# Altium PCB IMTM-Left-PCB02.PcbDoc
Units mm, origin at the board's own origin, x right, y up, seen from the top; angles counter-clockwise.
Board outline 27 x 21 mm, 3 copper layers (Top Layer, GND Layer, Bottom Layer), stack 1.49 mm thick; 9 components, 17 nets, 44 pads, 13 vias.
Unrouted connection lines stored in the file: 6.
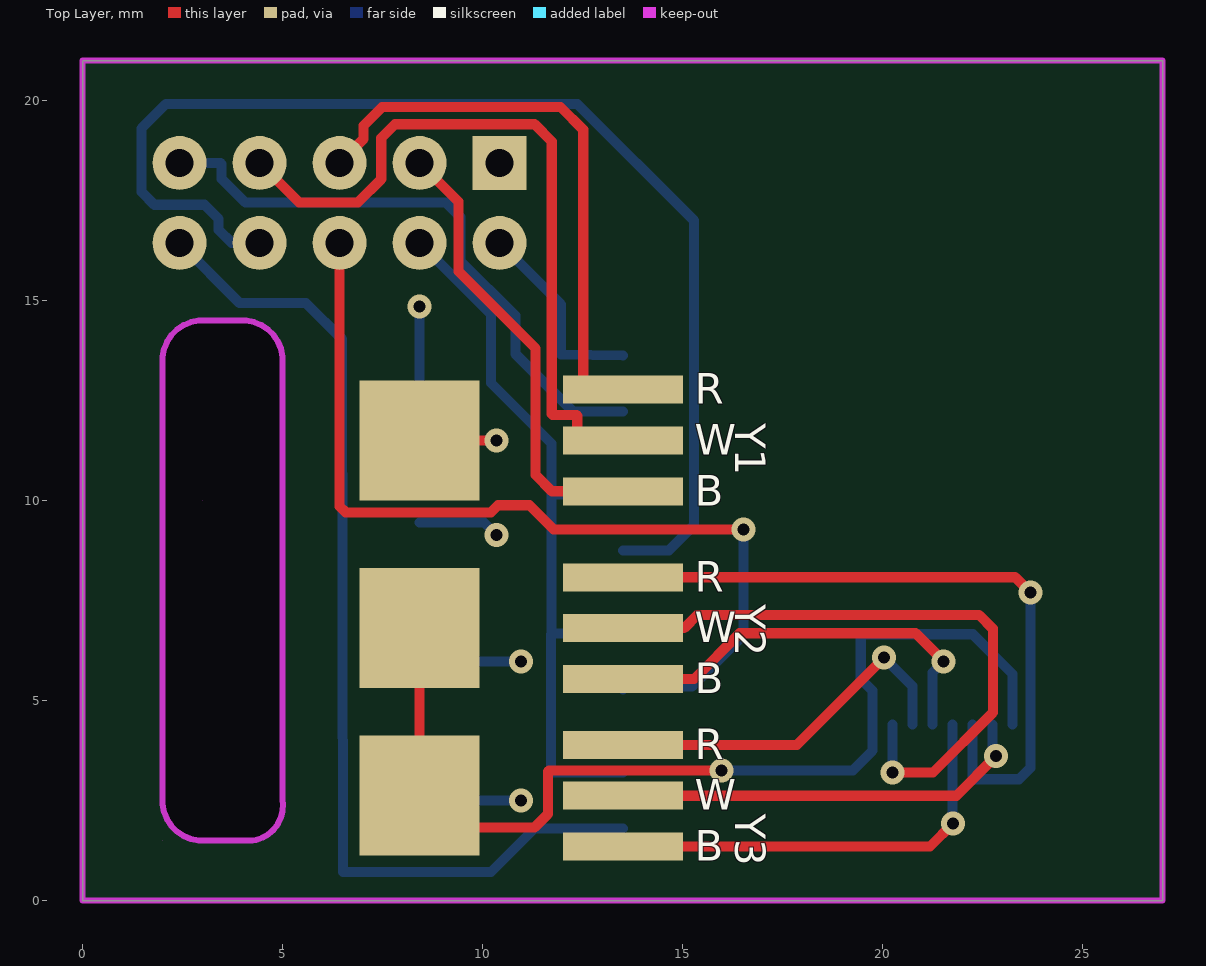
[diagram p0: Top Layer view]
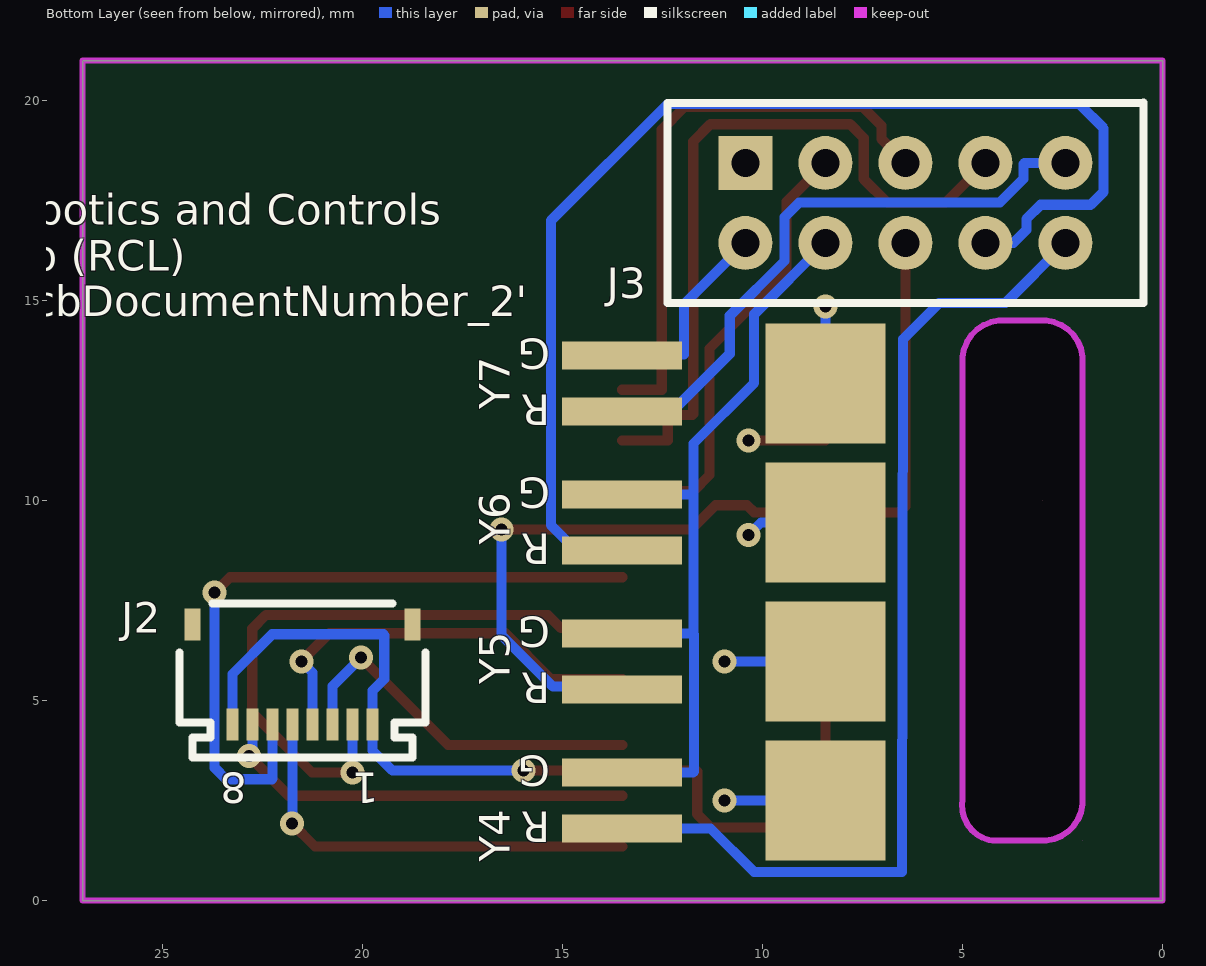
[diagram p1: Bottom Layer view, seen from below]
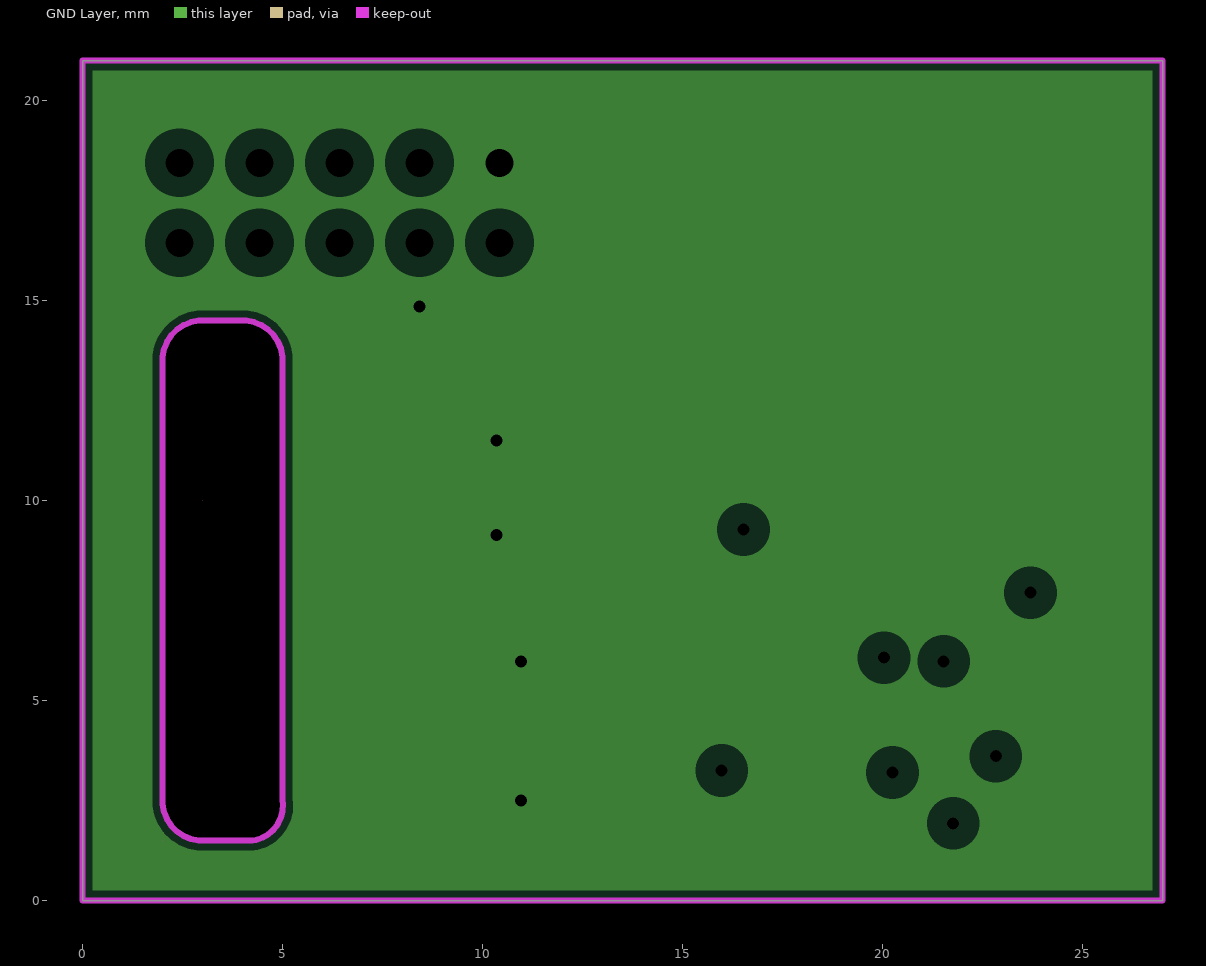
[diagram p2: GND Layer, clearances drawn from the general rule]

## Layer stack, top to bottom
Top Solder: solder mask 0.0254, SM-001, Dk 4
Top Layer: signal copper 0.035
Dielectric 1: prepreg 0.185, PP-7628, Dk 0
GND Layer: plane copper 0.035, net GND
Dielectric 2: core 1.2, Dk 0
Bottom Layer: signal copper 0.035
Bottom Solder: solder mask 0.0254, SM-001, Dk 4

## Board outline
0,0 27,0 27,21 24,21 0,21
cut-out: 2,2.5 2,13.5 cw(c3,13.5) 3,14.5 4,14.5 cw(c4,13.5) 5,13.5 5,2.5 cw(c4.125,2.375) 4.25,1.5 3,1.5 cw(c2.999,2.499)
cut-out: 2,2.5 2,13.5 cw(c3,13.5) 3,14.5 4,14.5 cw(c4,13.5) 5,13.5 5,2.5 cw(c4.125,2.375) 4.25,1.5 3,1.5 cw(c2.999,2.499)
cut-out: 3,10
cut-out: 3,10
cut-out: 2,13
cut-out: 2,1.5

## Design rules (kind name [scope] priority, off if disabled: settings)
Clearance [All] p1: gap=0.15 ignorepadtopadclearanceinfootprint=FALSE
ComponentClearance [All] p1: gap=0.1 collisioncheckmode=3 verticalgap=0.254 showdistances=FALSE
FabricationTestPointUsage TestPointUsage [All] p1: valid=0 allowmultiple=FALSE
FabricationTestpoint Testpoint [All] p1: side=3 testpointundercomponent=TRUE minsize=1.016 maxsize=2.54 preferedsize=1.524 minholesize=0 maxholesize=1.016 preferedholesize=0.813 testpointgrid=0.025 allowsidetop=TRUE allowsidebottom=TRUE usegrid=TRUE gridtolerance=0
PlaneClearance [All] p1: clearance=0.508
PlaneConnect [All] p1: planeconnectstyle=Relief reliefexpansion=0.254 reliefentries=4 reliefconductorwidth=0.254 reliefairgap=0.254
PolygonConnect [All] p1: connectstyle=Relief reliefconductorwidth=0.254 reliefentries=4 polygonreliefangle="90 Angle" airgapwidth=0.254
RoutingVias [All] p1: holewidth=0.3 width=0.6 viastyle="Through Hole" minholewidth=0.3 minwidth=0.6 maxholewidth=0.3 maxwidth=0.6
SilkToSolderMaskClearance SilkscreenOverComponentPads [IsPad] p1: minsilkscreentomaskgap=0.254 clearancetoexposedcopper=TRUE
SolderMaskExpansion [All] p1: expansion=0.102
UnRoutedNet [All] p1: checkbadconnections=TRUE
Width [All] p1: maxlimit=0.512 minlimit=0.127 preferedwidth=0.254
23 further rules are at their usual default settings.

## Components (designator, comment, footprint, x,y, rotation, side; value= is the part's Value field where it differs from the comment)
J2 "687108182122" PCBComponent_1 21.5,5.5 r0 bottom
J3 "B10B-PHDSS(LF)(SN)(P)" B10B-PHDSS(LF)(SN)(P) 10.426,18.44 r0 bottom
Y1 "4W_BRKOUT" 4W_BRKOUT 13,11.5 r270 top
Y2 "4W_BRKOUT" 4W_BRKOUT 13,6.81 r270 top
Y3 "4W_BRKOUT" 4W_BRKOUT 13,2.62 r270 top
Y4 "3W_BRKOUT" 3W_BRKOUT 13,2.5 r90 bottom
Y5 "3W_BRKOUT" 3W_BRKOUT 13,5.976 r90 bottom
Y6 "3W_BRKOUT" 3W_BRKOUT 13,9.452 r90 bottom
Y7 "3W_BRKOUT" 3W_BRKOUT 13,12.928 r90 bottom

## Footprints (in the part's own frame and the unit in brackets; to place one, negate y for a bottom-side part, rotate by r counter-clockwise, add the part's x,y. Pads: shape width x height; smd on the part's side, far side on the other; paste and mask are expansions set on the pad)
3W_BRKOUT [mm]
  rect 3x3 smd: 1(0,-4.572)
  rect 0.7x3 smd: 2(-0.7,0.508) 3(0.7,0.508)
4W_BRKOUT [mm]
  rect 3x3 smd: 1(0,-4.572)
  rect 0.7x3 smd: 2(-1.27,0.508) 3(0,0.508) 4(1.27,0.508)
B10B-PHDSS(LF)(SN)(P) [mm]
  rect 1.35x1.35 / inner round 1.35 / far side rect 1.35x1.35 hole 0.7: 1(0,0)
  round 1.35 hole 0.7: 2(0,2) 3(-2,0) 4(-2,2) 5(-4,0) 6(-4,2) 7(-6,0) 8(-6,2) 9(-8,0) 10(-8,2)
  silkscreen extent -9.95,-1.52 1.95,3.5, body extent -10.03,-1.6 2.03,3.6, height 6.5
PCBComponent_1 [mm]
  rect 0.3x0.8 smd: 1(-1.75,1.1) 2(-1.25,1.1) 3(-0.75,1.1) 4(-0.25,1.1) 5(0.25,1.1) 6(0.75,1.1) 7(1.25,1.1) 8(1.75,1.1)
  rect 0.4x0.8 smd: MP1(-2.75,-1.4) MP2(2.75,-1.4)
  silkscreen extent -3.08,-1.92 3.07,1.93, body extent -3,-1.85 3,1.85, height 0.98

## Part data
J2: "CONN FFC FPC 8POS 0.5MM R/A", Current Rating=500mA, Flammability Rating="UL94 V-0", Manufacturer="Wurth Electronics", Max Operating Temperature=105°C, Min Operating Temperature=-40°C, Supplier Part Number 1=732-10016-1-ND, Voltage Rating=50V, Actuator Material=Nylon,Polyamide, Category="FFC / FPC", ComponentLink1Description=https://media.digikey.com/pdf/Data%20Sheets/Wurth%20Electronics%20PDFs/WR-FPC_FFC_Flyer.pdf?src-supplier=Digi-Key, ComponentLink1URL=https://media.digikey.com/pdf/Data%20Sheets/Wurth%20Electronics%20PDFs/WR-FPC_FFC_Flyer.pdf?src-supplier=Digi-Key, Contact Material=Bronze, Contact Plating=Tin, Housing Material=Polymer, Manufacturer Part Number=687108182122, Mount="Surface Mount", Number of Positions=8, Packaging="Tape and Reel", Pitch=0.02inch, Pricing 1="1=1.41000, 100=1.17880, 500=1.03730, 1000=0.84870 (USD)", RoHS=Yes, Stock 1=1416, Supplier 1=Digi-Key, Termination=Solder
J3: "JST (JAPAN SOLDERLESS TERMINALS) - B10B-PHDSS(LF)(SN)(P) - CONNECTOR, HEADER, 10POS, 2MM, 2ROW", Color=Natural, Current Rating=3A, Manufacturer=JST, Package Quantity=500, Supplier Part Number 1=6881379, Voltage Rating=250V, Category=Connectors, ComponentLink1Description=https://datasheet.ciiva.com/11754/0900766b80ddecc5-11754210.pdf?src-supplier=RSComponents, ComponentLink1URL=https://datasheet.ciiva.com/11754/0900766b80ddecc5-11754210.pdf?src-supplier=RSComponents, ComponentLink2Description=https://datasheet.ciiva.com/712/ephd-712656.pdf?src-supplier=Digi-Key, ComponentLink2URL=https://datasheet.ciiva.com/712/ephd-712656.pdf?src-supplier=Digi-Key, ComponentLink3Description=https://datasheet.ciiva.com/46409/1699380-46409223.pdf?src-supplier=Element14, ComponentLink3URL=https://datasheet.ciiva.com/46409/1699380-46409223.pdf?src-supplier=Element14, Connector Type="Male Pin", Contact Material="Copper Alloy,Copper", Contact Plating=Tin, Gender=Male, Manufacturer Part Number=B10B-PHDSS(LF)(SN)(P), Mount="Through Hole", Number of Contacts=10, Number of Positions=10, Number of Rows=2, Orientation=Straight, Packaging=Bulk, Pitch=0.079inch, Pricing 1="5=0.54600, 125=0.40900, 500=0.37700, 2500=0.36900, 5000=0.36200 (USD)", REACH SVHC=Unknown, RoHS=Yes, Row Spacing=0.079inch, Stock 1=35, Supplier 1=RSComponents, Termination=Solder

## Via types
v1: diameter 0.6, hole 0.3, Top Layer to Bottom Layer, 13 vias

## Nets (pads, with @x,y where several pads share a name; then routed paths per layer and width w, separated by ;. In a path a pad name is that pad's centre, name@x,y a point inside that pad or via, vN(x,y) a via of type N, cw(c..) or ccw(c..) an arc to the next point about the centre after c; other vN are vias at no path point)
ENC_CHA: J3.6 Y5.2 | length 23.3
  Top Layer w0.254: J3.6 6.426,9.855 6.579,9.703 10.211,9.703 10.389,9.881 11.176,9.881 11.782,9.275 v1(16.525,9.275)
  Bottom Layer w0.254: Y5.2 13.582,5.35 15.24,5.35 16.525,6.635 v1(16.525,9.275)
ENC_CHB: J3.10 Y4.2 | length 25.8
  Bottom Layer w0.254: J3.10 3.931,14.935 5.588,14.935 6.49,14.034 6.515,0.711 10.211,0.711 11.3,1.8 Y4.2
ENC_GND: J3.4 Y4.3 Y5.3 Y6.3 | length 20
  Bottom Layer w0.254: J3.4 10.211,14.656 10.211,12.939 11.725,11.425 11.725,10.15 ; 11.725,6.666 11.725,10.15 ; Y4.3 11.735,3.2 11.709,3.225 11.709,6.651 11.735,6.676 Y5.3 ; Y6.3 11.727,10.152 11.725,10.15
ENC_VCC: J3.8 Y6.2 | length 30.2
  Bottom Layer w0.254: J3.8 3.727,16.44 3.404,16.764 3.404,17.037 3.048,17.392 1.797,17.392 1.473,17.716 1.473,19.304 2.083,19.914 12.37,19.914 15.291,16.993 15.291,9.387 14.656,8.752 Y6.2
GND: J3.1 Y1.1 Y4.1 Y5.1 Y6.1 Y7.1 | length 11
  Top Layer w0.254: Y1.1 v1(10.355,11.5)
  Bottom Layer w0.254: Y4.1 v1(10.956,2.5) ; Y5.1 v1(10.956,5.976) v1@10.946,5.976 ; Y6.1 10.038,9.452 v1(10.355,9.135) ; Y7.1 v1(8.428,14.855)
HLE1_GND: J2.5 Y3.4 | length 11
  Top Layer w0.254: Y3.4 21.187,1.35 v1(21.768,1.93)
  Bottom Layer w0.254: J2.5 21.75,1.948 v1(21.768,1.93)
HLE1_VCC: J2.3 Y3.2 | length 9.4
  Top Layer w0.254: Y3.2 17.856,3.89 v1(20.037,6.071)
  Bottom Layer w0.254: v1(20.037,6.071) 20.75,5.357 J2.3
HLE1_VOUT: J2.7 Y3.3 | length 10.6
  Top Layer w0.254: Y3.3 21.848,2.62 v1(22.835,3.607)
  Bottom Layer w0.254: J2.7 22.75,3.691 v1(22.835,3.607)
HLE2_GND: J2.4 Y2.4 | length 10.5
  Top Layer w0.254: Y2.4 15.291,5.54 16.431,6.68 20.828,6.68 v1(21.529,5.979)
  Bottom Layer w0.254: J2.4 21.25,5.699 v1(21.529,5.979)
HLE2_VCC: J2.6 Y2.2 | length 17.7
  Top Layer w0.254: Y2.2 23.314,8.08 v1(23.698,7.696)
  Bottom Layer w0.254: J2.6 22.25,3.047 22.267,3.03 23.412,3.03 23.698,3.316 v1(23.698,7.696)
HLE2_VOUT: J2.2 Y2.3 | length 16
  Top Layer w0.254: Y2.3 15.04,6.81 15.367,7.137 22.415,7.137 22.758,6.794 22.758,4.697 21.262,3.2 v1(20.25,3.2)
  Bottom Layer w0.254: v1(20.25,3.2) J2.2
HLE_GNDPLN: J2.1 J2.8 Y2.1 Y3.1 | length 25.7
  Top Layer w0.254: Y2.1 Y3.1 9.219,1.829 11.303,1.829 11.633,2.159 11.633,3.226 11.659,3.251 v1(15.977,3.251)
  Bottom Layer w0.254: v1(15.977,3.251) 19.255,3.251 19.75,3.746 J2.1 19.75,5.244 19.456,5.537 19.456,6.629 19.482,6.655 22.259,6.655 23.25,5.664 J2.8
MTR+: J3.9 Y7.2 | length 15.1
  Bottom Layer w0.254: J3.9 3.449,18.44 3.474,18.415 3.474,18.046 4.07,17.45 9.08,17.45 9.449,17.081 9.449,15.989 10.82,14.618 10.82,13.665 12.258,12.228 Y7.2
MTR-: J3.2 Y7.3 | length 5
  Bottom Layer w0.254: J3.2 11.963,14.903 11.963,13.653 Y7.3
POT_GND: J3.3 Y1.4 | length 11.4
  Top Layer w0.254: J3.3 9.398,17.469 9.398,15.73 11.327,13.801 11.327,10.638 11.735,10.23 Y1.4
POT_REF: J3.5 Y1.2 | length 14.6
  Top Layer w0.254: J3.5 7.028,19.042 7.028,19.374 7.493,19.839 11.949,19.839 12.517,19.271 12.517,12.77 Y1.2
POT_WIPER: J3.7 Y1.3 | length 18.5
  Top Layer w0.254: J3.7 5.417,17.45 6.883,17.45 7.468,18.034 7.468,19.063 7.81,19.406 11.303,19.406 11.731,18.978 11.731,12.167 11.756,12.141 12.344,12.141 12.37,12.116 12.37,11.5 Y1.3
pads on no net: J2.MP1 J2.MP2

## Polygon pours and split planes (outlines as drawn)
GND on GND Layer (split plane): 26.744,0.256 0.256,0.256 0.256,20.744 26.744,20.744

## Keep-outs
Keep-Out Layer:
  lines w0.15: 2,2.5 2,2.401 2.038,2.208 2.114,2.026 2.223,1.862 2.362,1.723 2.526,1.614 2.708,1.538 2.901,1.5 3,1.5 4.25,1.5 ; 2,2.5 2,2.5 ; 2,2.5 2,13.5 2,13.598 2.038,13.792 2.114,13.974 2.223,14.137 2.363,14.277 2.526,14.386 2.708,14.462 2.901,14.5 3,14.5 ; 3,14.5 4,14.5 4.098,14.5 4.292,14.462 4.474,14.386 4.637,14.277 4.777,14.137 4.886,13.974 4.962,13.792 5,13.598 5,13.5 ; 3,14.5 3,14.5 ; 4.25,1.5 4.336,1.512 4.5,1.57 4.65,1.659 4.78,1.775 4.884,1.914 4.96,2.071 5.003,2.24 5.012,2.414 5,2.5 5,13.5 ; 4.25,1.5 4.25,1.5 ; 5,13.5 5,13.5 ; 0,0 0,21 27,21 27,0 0,0

## Silkscreen, mask and mechanical layers (free items; w line width, h text height)
Bottom Overlay:
  text "Robotics and Controls / Lab (RCL) / '.PcbDocumentNumber_2'" at 29.527,14.605 h0.76
Titleblock:
  lines w0.127: -167.767,-10.541 -162.687,-10.541 ; -167.767,37.719 -162.687,37.719 ; -167.767,85.979 -162.687,85.979 ; -94.742,-58.801 -94.742,-53.721 ; -94.742,129.159 -94.742,134.239 ; -21.717,-58.801 -21.717,-53.721 ; -21.717,129.159 -21.717,134.239 ; 4.953,-46.101 119.253,-46.101 ; 4.953,-38.481 119.253,-38.481 ; 4.953,-30.861 43.053,-30.861 ; 43.053,-53.721 43.053,-38.481 43.053,-23.241 ; 51.308,-58.801 51.308,-53.721 ; 51.308,129.159 51.308,134.239 ; 96.393,-53.721 96.393,-38.481 ; 119.253,-10.541 124.333,-10.541 ; 119.253,37.719 124.333,37.719 ; 119.253,85.979 124.333,85.979 ; 4.953,-53.721 119.253,-53.721 ; 4.953,-53.721 -30.607,-53.721 -30.607,-23.241 4.953,-23.241 ; 4.953,-53.721 4.953,-23.241 ; 4.953,-23.241 43.053,-23.241 ; 43.053,-23.241 119.253,-23.241 119.253,-53.721 ; 119.253,-53.721 -162.687,-53.721 -162.687,129.159 119.253,129.159 119.253,-53.721 ; -167.767,-58.801 124.333,-58.801 124.333,134.239 -167.767,134.239 -167.767,-58.801
  text "1" at -131.521,130.81 h1.78
  text "2" at -58.877,130.81 h1.78
  text "3" at 14.275,130.81 h1.78
  text "4" at 87.173,130.81 h1.78
  text "A" at -165.862,107.798 h1.78
  text "A" at 121.158,107.798 h1.78
  text "B" at -165.862,59.741 h1.78
  text "B" at 121.158,59.741 h1.78
  text "C" at -165.862,11.227 h1.78
  text "C" at 121.158,11.227 h1.78
  text "ENGINEER:" at 6.223,-25.781 h1.14
  text "TITLE:" at 44.323,-25.781 h1.14
  text "Tolerances unless otherwise specified:" at -73.236,-26.451 h1.52
  text "Robotics and Controls" at -28.163,-27.755 h3.18
  text ".ProjectTitle" at 52.118,-29.247 h6.35
  text ".X +/- 0.20" at -67.902,-29.626 h1.52
  text "'.DrawnBy'" at 7.109,-29.68 h3.17
  text "'.DrawnDate'" at 26.359,-29.683 h3.17
  text "Laboratory (RCL)" at -28.163,-31.005 h3.18
  text ".XX +/- 0.10" at -69.299,-32.166 h1.52
  text "PCB DESIGNER:" at 6.223,-33.274 h1.14
  text "'.DocumentTitle'" at 52.118,-33.341 h3.81
  text ".XXX +/- 0.05" at -70.696,-34.706 h1.52
  text "D" at -165.862,-36.779 h1.78
  text "D" at 121.158,-36.779 h1.78
  text "'.DrawnBy'" at 6.945,-37.047 h3.17
  text "'.DrawnDate'" at 26.195,-37.05 h3.17
  text "DATE:" at 6.223,-41.021 h1.14
  text "PART NO.:" at 44.323,-41.021 h1.14
  text "REV:" at 97.663,-41.021 h1.14
  text "3090 Kaiser Building" at -26.797,-43.561 h3.17
  text "'.PcbDocumentNumber_2'" at 55.109,-44.18 h3.17
  text ".PRINT_DATE" at 8.109,-44.43 h3.17
  text "'.Rev'" at 97.731,-44.822 h3.17
  text "2332 Main Mall" at -26.797,-46.101 h3.17
  text "Vancouver, BC" at -26.797,-48.641 h3.17
  text "FILE NAME:" at 6.223,-48.641 h1.14
  text "DWG NO:" at 44.323,-48.641 h1.14
  text "SCALE:" at 97.663,-48.641 h1.14
  text "V6J 1R6" at -26.797,-51.181 h3.17
  text ".PCB_FILE_NAME_NO_PATH" at 5.859,-51.93 h3.17
  text "'.PcbDocumentNumber_2'" at 54.609,-51.93 h3.17
  text "1:1" at 97.815,-52.764 h3.17
  text "1" at -131.521,-57.15 h1.78
  text "2" at -58.877,-57.15 h1.78
  text "3" at 14.275,-57.15 h1.78
  text "4" at 87.173,-57.15 h1.78
Drill Drawing:
  lines w0.127: 22.995,78.744 80.78,78.744 80.78,81.538 22.995,81.538 22.995,78.744 ; 23.12,99.168 23.12,101.962 80.905,101.962 80.905,99.168 23.12,99.168 ; 28.2,85.706 28.2,88.5 75.825,88.5 75.825,85.706 28.2,85.706 ; 28.2,92.564 75.825,92.564 75.825,95.358 28.2,95.358 28.2,92.564
  lines w0.254: 50.872,74.18 80.717,74.18 ; 22.995,82.046 80.78,82.046 80.78,85.094 22.995,85.094 22.995,82.046 ; 23.12,89.008 80.905,89.008 80.905,92.056 23.12,92.056 23.12,89.008 ; 23.12,95.866 23.12,98.66 80.905,98.66 80.905,95.866 23.12,95.866
  text "NOTES:" at -156.346,124.375 h1
  text "1." at -156.346,121.375 h1
  text "Performance and qualification per latest revisions of  IPC-6011 and 6012:  Class 2." at -151.536,121.375 h1
  text "2." at -156.346,118.375 h1
  text "Acceptance per latest revisions of  IPC-A-600 and IPC-A-610:  Class 2." at -151.536,118.375 h1
  text "3." at -156.346,115.375 h1
  text "Finished assembly to comply with latest amendments to EU Directive 2011/65/EU (RoHS2)." at -151.536,115.375 h1
  text "4." at -156.346,112.375 h1
  text "Flame Class:" at -151.536,112.375 h1
  text "UL 94V-0" at -137.8,112.375 h1
  text "5." at -156.346,109.375 h1
  text "Flammability rating and manufacturer's UL file number to be marked on bottom silkscreen." at -151.536,109.375 h1
  text "6." at -156.346,106.375 h1
  text "Dimensions are in mm unless specified otherwise.  Tolerances are as indicated on Dimensions layer unless otherwise noted." at -151.536,106.375 h1
  text "7." at -156.346,103.375 h1
  text "All dimensional limits apply after plating or processing." at -151.8,103.375 h1
  text "8." at -156.346,100.375 h1
  text "Refer to drill table for hole size tolerances." at -151.8,100.375 h1
  text "SOLDERMASK" at 29.47,99.93 h1.27
  text "0.025 mm" at 65.919,99.93 h1.27
  text "9." at -156.346,97.375 h1
  text "Hole / slot plating to be 0.001\" minimum average and 0.0008\" absolute minimum." at -151.8,97.375 h1
  text "L01 / TOP" at 24.136,96.628 h1.27
  text "1.0 Oz Cu" at 38.36,96.628 h1.27
  text "0.035 mm" at 65.919,96.628 h1.27
  text "Hole / slot diameters are specified after plating." at -151.8,94.375 h1
  text "PREPREG" at 29.47,93.326 h1.27
  text "PP7628" at 38.36,93.326 h1.27
  text "0.185 mm" at 65.919,93.326 h1.27
  text "10." at -156.346,91.375 h1
  text "Board thickness and tolerance are as indicated on Layer Stack detail." at -151.8,91.375 h1
  text "L02 / PLN" at 24.136,89.77 h1.27
  text "1.0 Oz Cu" at 38.36,89.77 h1.27
  text "0.035 mm" at 65.919,89.77 h1.27
  text "11." at -156.346,88.375 h1
  text "Remove all sharp edges and burrs 0.003\" maximum." at -151.8,88.375 h1
  text "CORE" at 29.47,86.468 h1.27
  text "1.200 mm" at 65.919,86.468 h1.27
  text "12." at -156.346,85.375 h1
  text "Base Material:" at -151.8,85.375 h1
  text "As noted in layer stack." at -135.8,85.375 h1
  text "L03 / BOT" at 24.011,82.808 h1.27
  text "1.0 Oz Cu" at 38.235,82.808 h1.27
  text "0.035 mm" at 65.794,82.808 h1.27
  text "13." at -156.346,82.375 h1
  text "Soldermask:" at -151.8,82.375 h1
  text "Liquid Photo Imageable in accordance with IPC-SM-840 (latest revision)." at -135.8,82.375 h1
  text "FINISHED THICKNESS" at 16.008,81.782 h1.27 r90
  text "1.6 mm +/- 0.1mm" at 18.04,81.241 h1.27 r90
  text "SOLDERMASK" at 29.345,79.506 h1.27
  text "0.025 mm" at 65.794,79.506 h1.27
  text "Finish to be green and glossy.  Registration to be within +/- 0.003 of respective" at -135.8,79.375 h1
  text "outer circuit layers." at -135.8,76.375 h1
  text "LAYER STACK DETAIL" at 50.782,75.196 h2.03
  text "14." at -156.346,73.375 h1
  text "Silkscreen:" at -151.8,73.375 h1
  text "White non-conductive ink (top and bottom).  No ink to appear on exposed copper." at -135.8,73.375 h1
  text "NOT TO SCALE" at 67.566,72.275 h1.27
  text "15." at -156.346,70.454 h1
  text "Finish:" at -151.8,70.454 h1
  text "Electroless Nickel Immersion Gold (ENIG).  Finish both sides with 150 micro inches" at -135.8,70.454 h1
  text "minimum electroless Nickel (Ni) followed by minimum 2 microinches immersion Gold (Au)." at -135.8,67.375 h1
  text "16." at -156.346,64.375 h1
  text "Electrical Test:" at -151.8,64.375 h1
  text "Perform 100% continuity and isolation testing per current IPC test methods." at -135.8,64.375 h1
  text "17." at -156.346,61.375 h1
  text "Controlled impedance is not required." at -151.8,61.375 h1
  text "18." at -156.346,58.375 h1
  text "Coordinate panelization with contract manufacturer." at -151.8,58.375 h1

## Dimensions
0,21 to 5,8 on Mech Drawing
0,21.254 to 2,8 on Mech Drawing
-0.254,21 to 3.5,14.5 on Mech Drawing
0,21 to 3.625,1.5 on Mech Drawing
0,21 to 27,21 on Mech Drawing
0,21 to 0,0 on Mech Drawing
23.12,101.962 to 22.995,78.744 on Drill Drawing

## Text inside footprints (layer, text, board x,y; h text height)
J2: Bottom Overlay "1" at 19.6,3.2 h0.76 r180; Bottom Overlay "8" at 22.9,3.2 h0.76 r180
Y1: Top Overlay "B" at 15.311,9.874 h0.76; Top Overlay "R" at 15.311,12.414 h0.76; Top Overlay "W" at 15.311,11.144 h0.76
Y2: Top Overlay "B" at 15.311,5.184 h0.76; Top Overlay "R" at 15.311,7.724 h0.76; Top Overlay "W" at 15.311,6.454 h0.76
Y3: Top Overlay "W" at 15.311,2.264 h0.76; Top Overlay "B" at 15.311,0.994 h0.76; Top Overlay "R" at 15.311,3.534 h0.76
Y4: Bottom Overlay "R" at 15.311,2.221 h0.76 r180; Bottom Overlay "G" at 15.311,3.618 h0.76 r180
Y5: Bottom Overlay "R" at 15.311,5.697 h0.76 r180; Bottom Overlay "G" at 15.311,7.094 h0.76 r180
Y6: Bottom Overlay "G" at 15.311,10.57 h0.76 r180; Bottom Overlay "R" at 15.311,9.173 h0.76 r180
Y7: Bottom Overlay "G" at 15.311,14.046 h0.76 r180; Bottom Overlay "R" at 15.311,12.649 h0.76 r180